# Altium PCB STM32_PCB.PcbDoc
Units mm, origin at the board's own origin, x right, y up, seen from the top; angles counter-clockwise.
Board outline 44 x 44 mm, 4 copper layers (Top Layer, Int1 (GND), Int2 (PWR), Bottom Layer), stack 1.57 mm thick; 35 components, 27 nets, 174 pads, 167 vias.
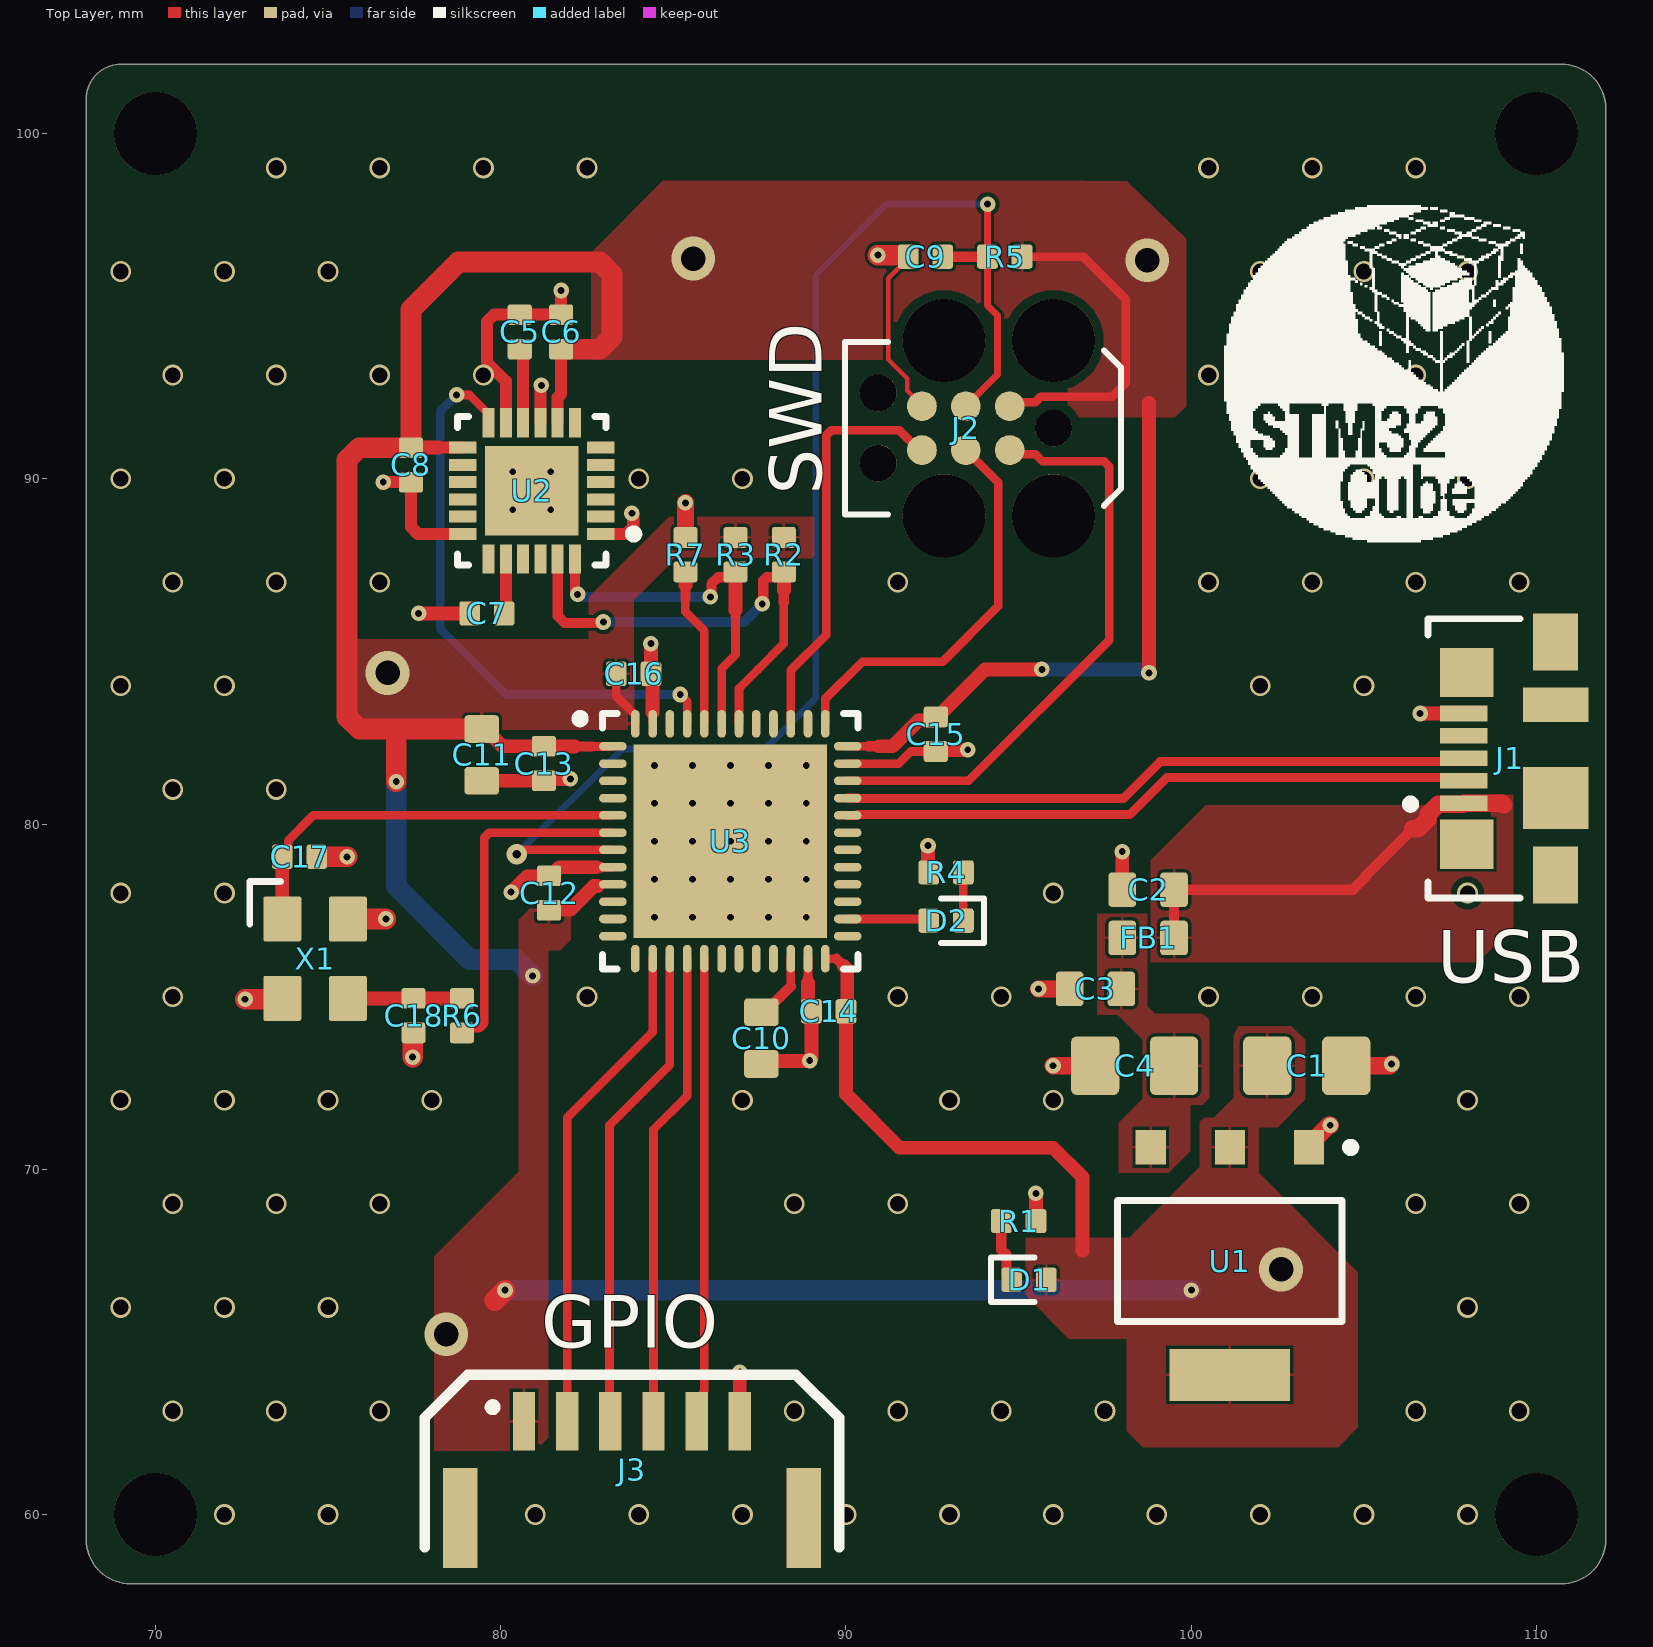
[diagram p0: Top Layer view]
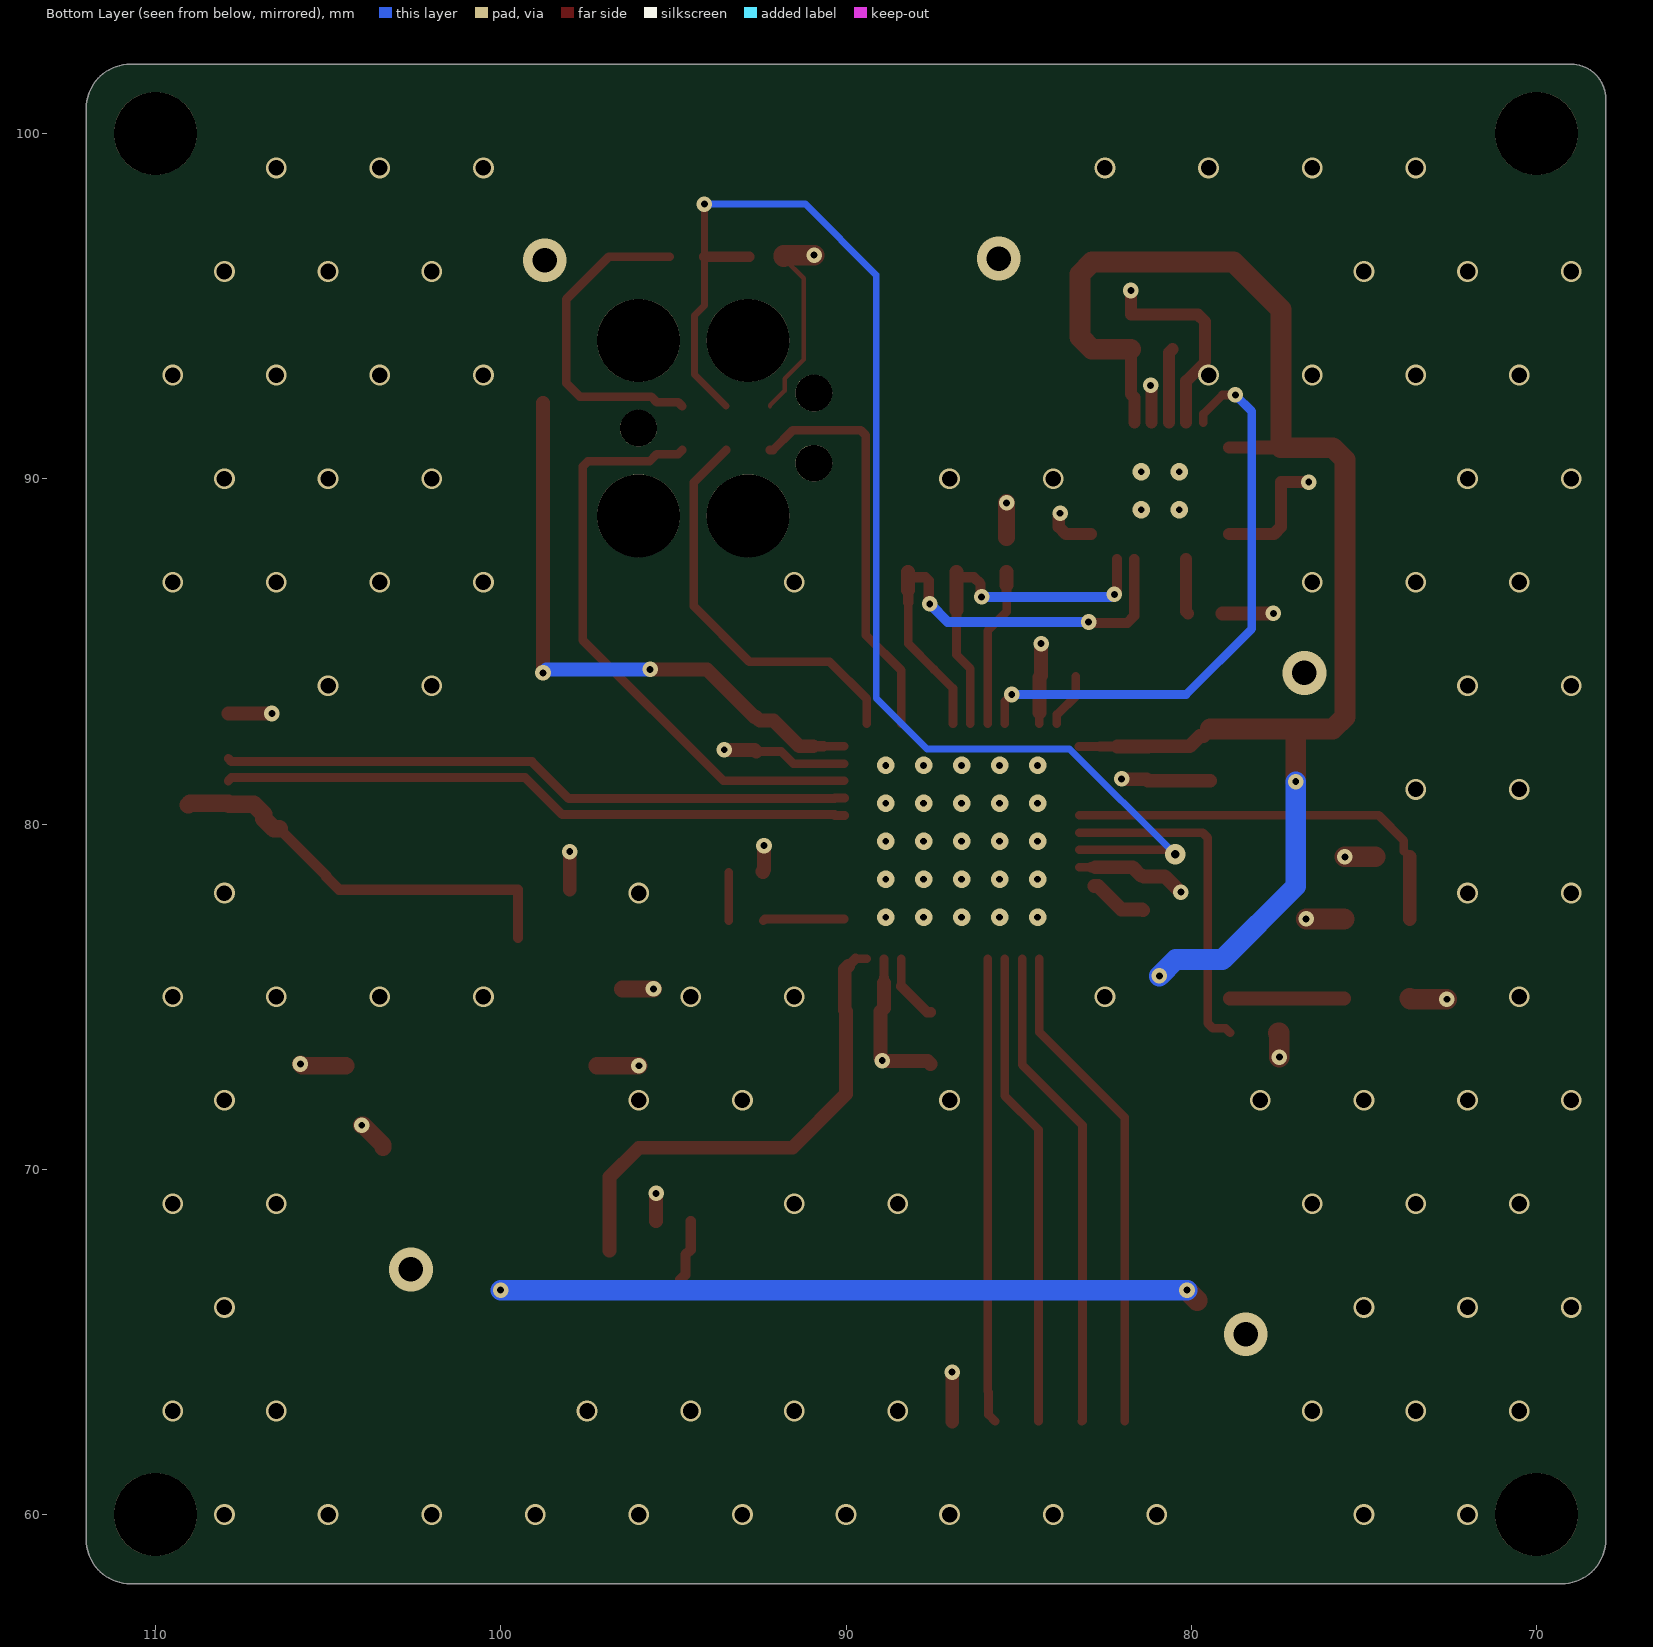
[diagram p1: Bottom Layer view, seen from below]
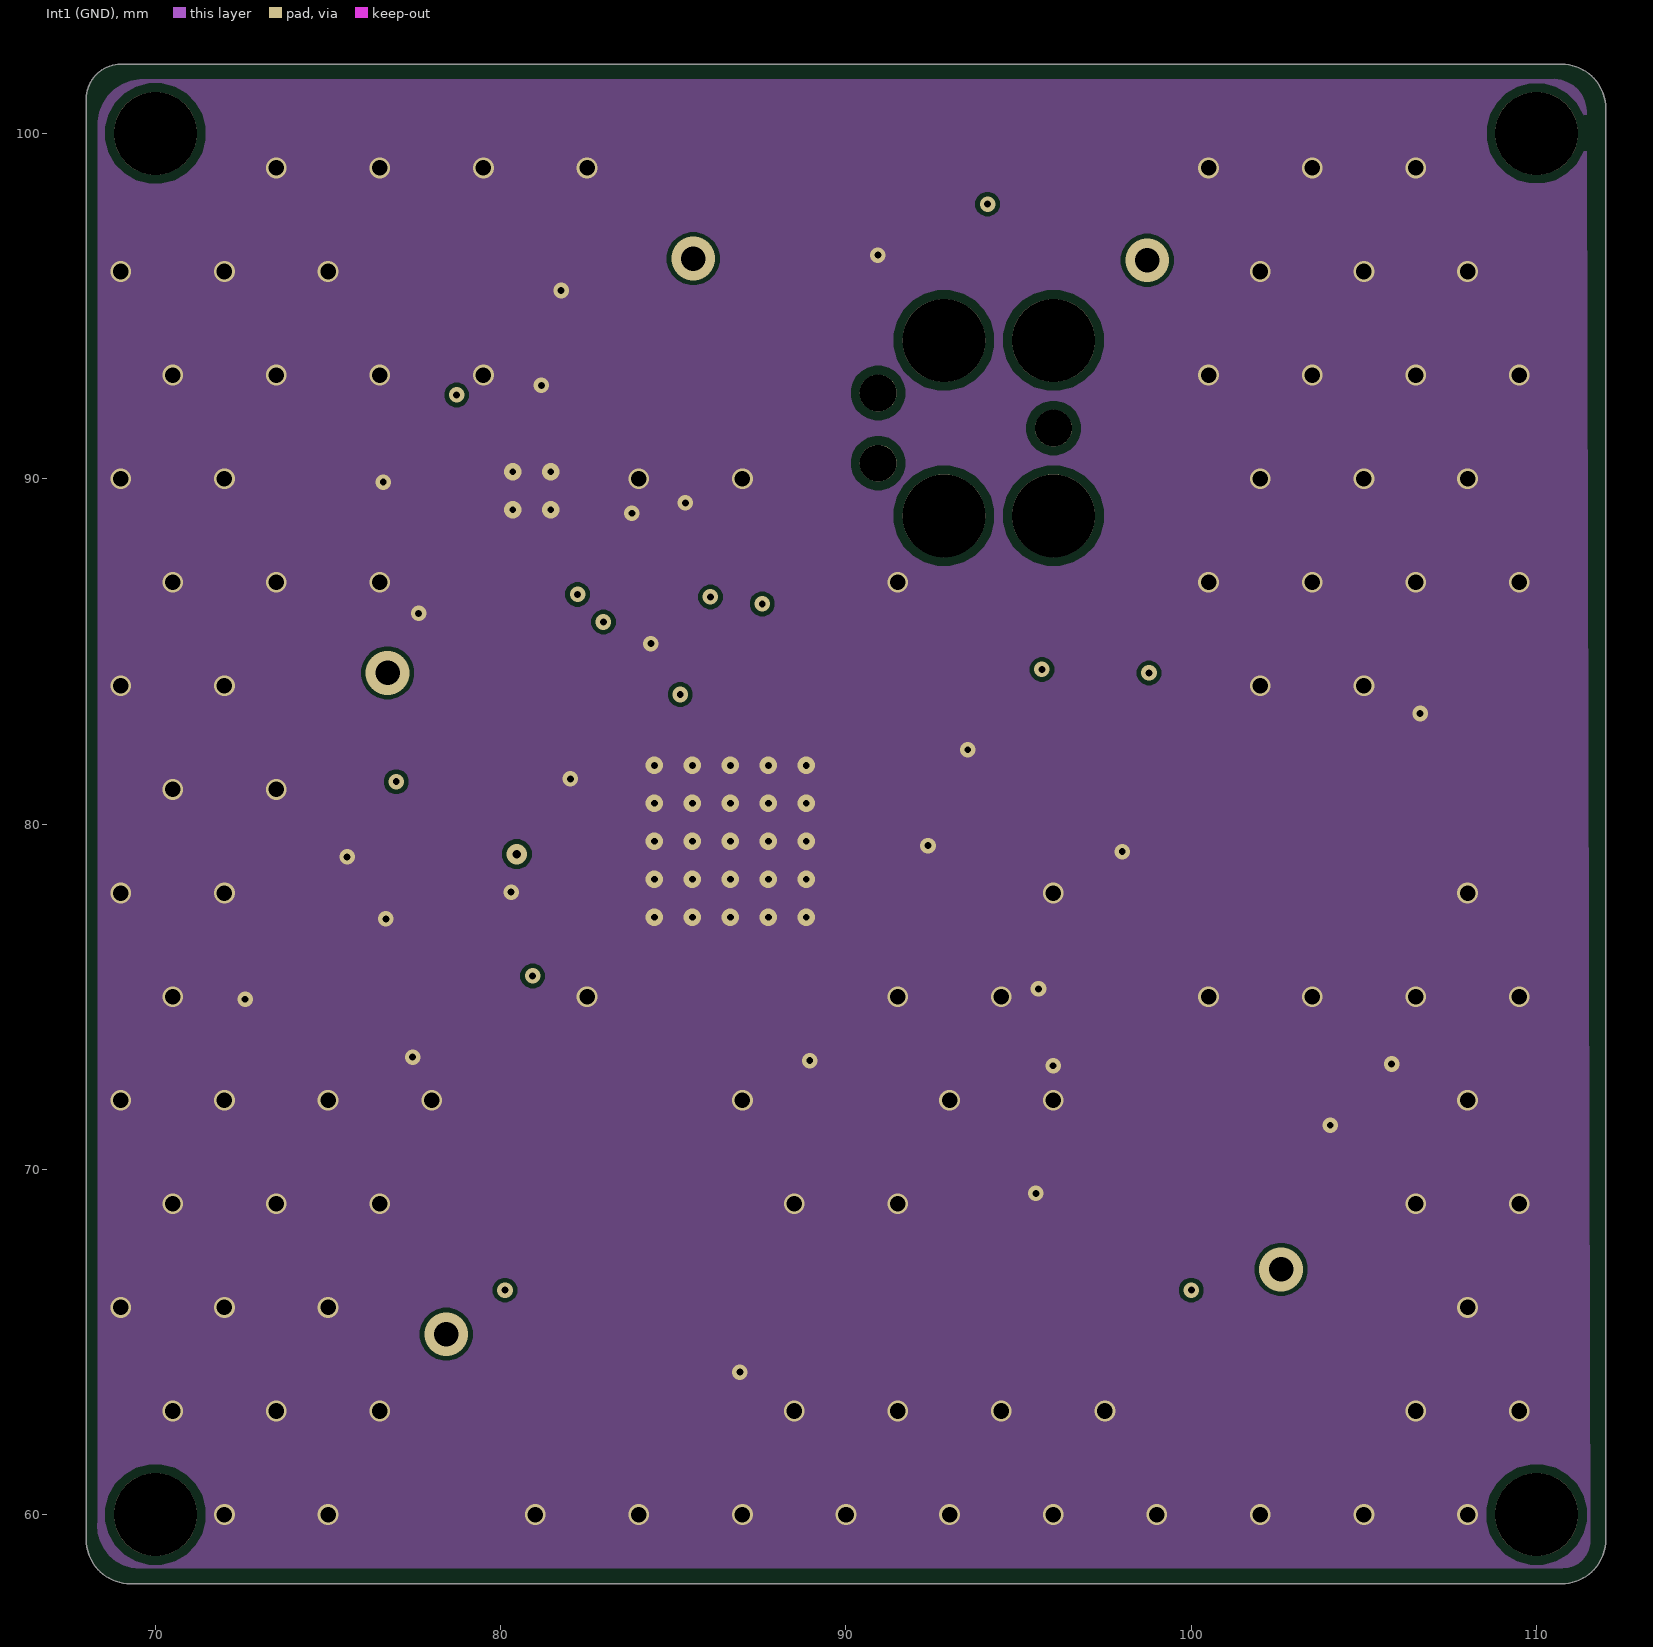
[diagram p2: Int1 (GND)]
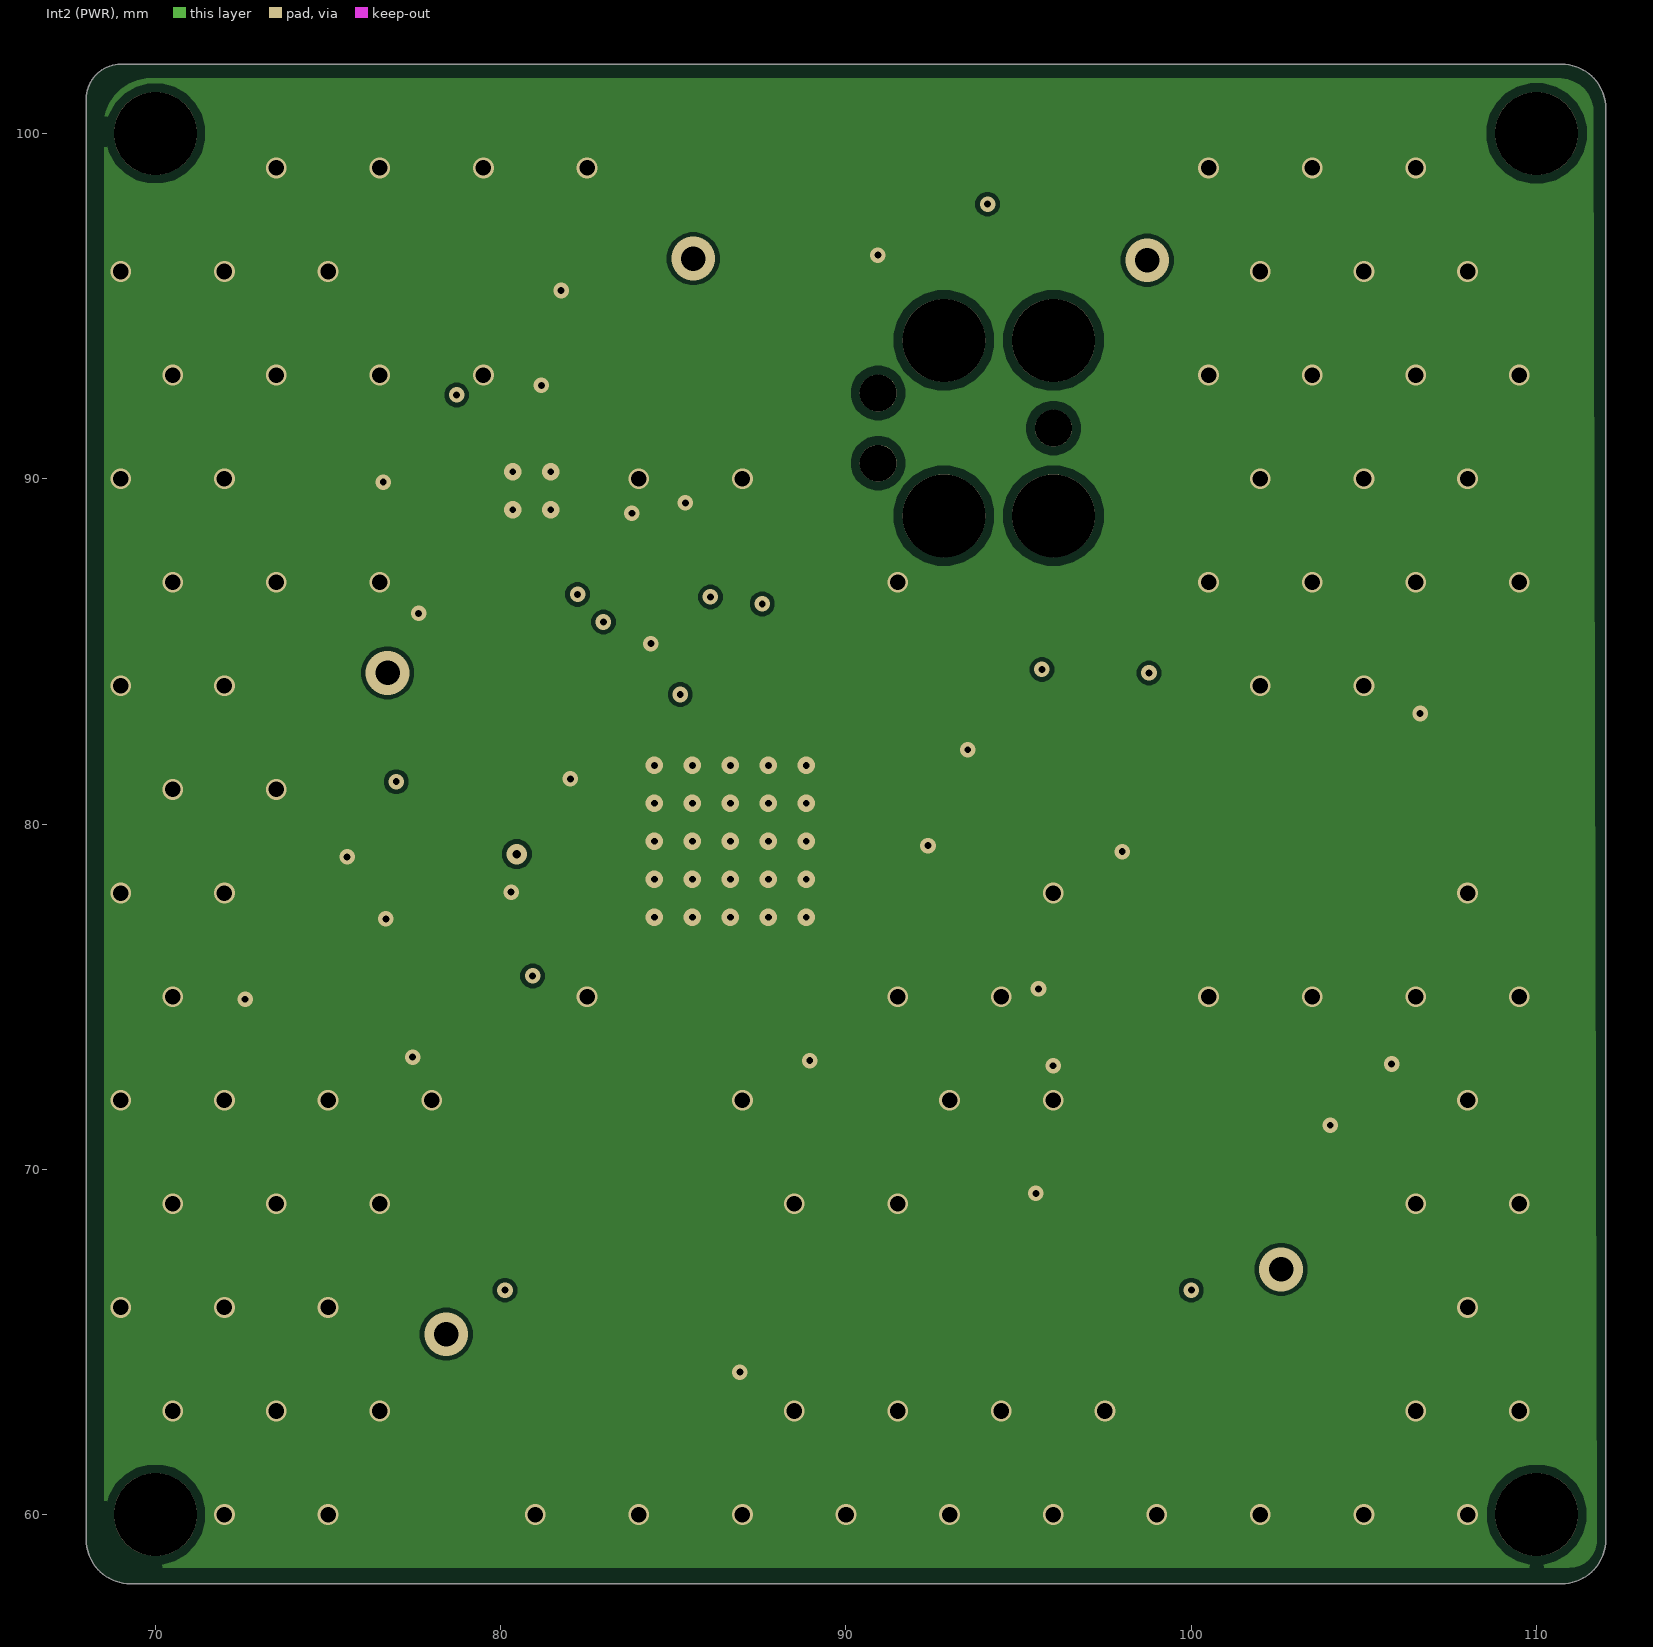
[diagram p3: Int2 (PWR)]
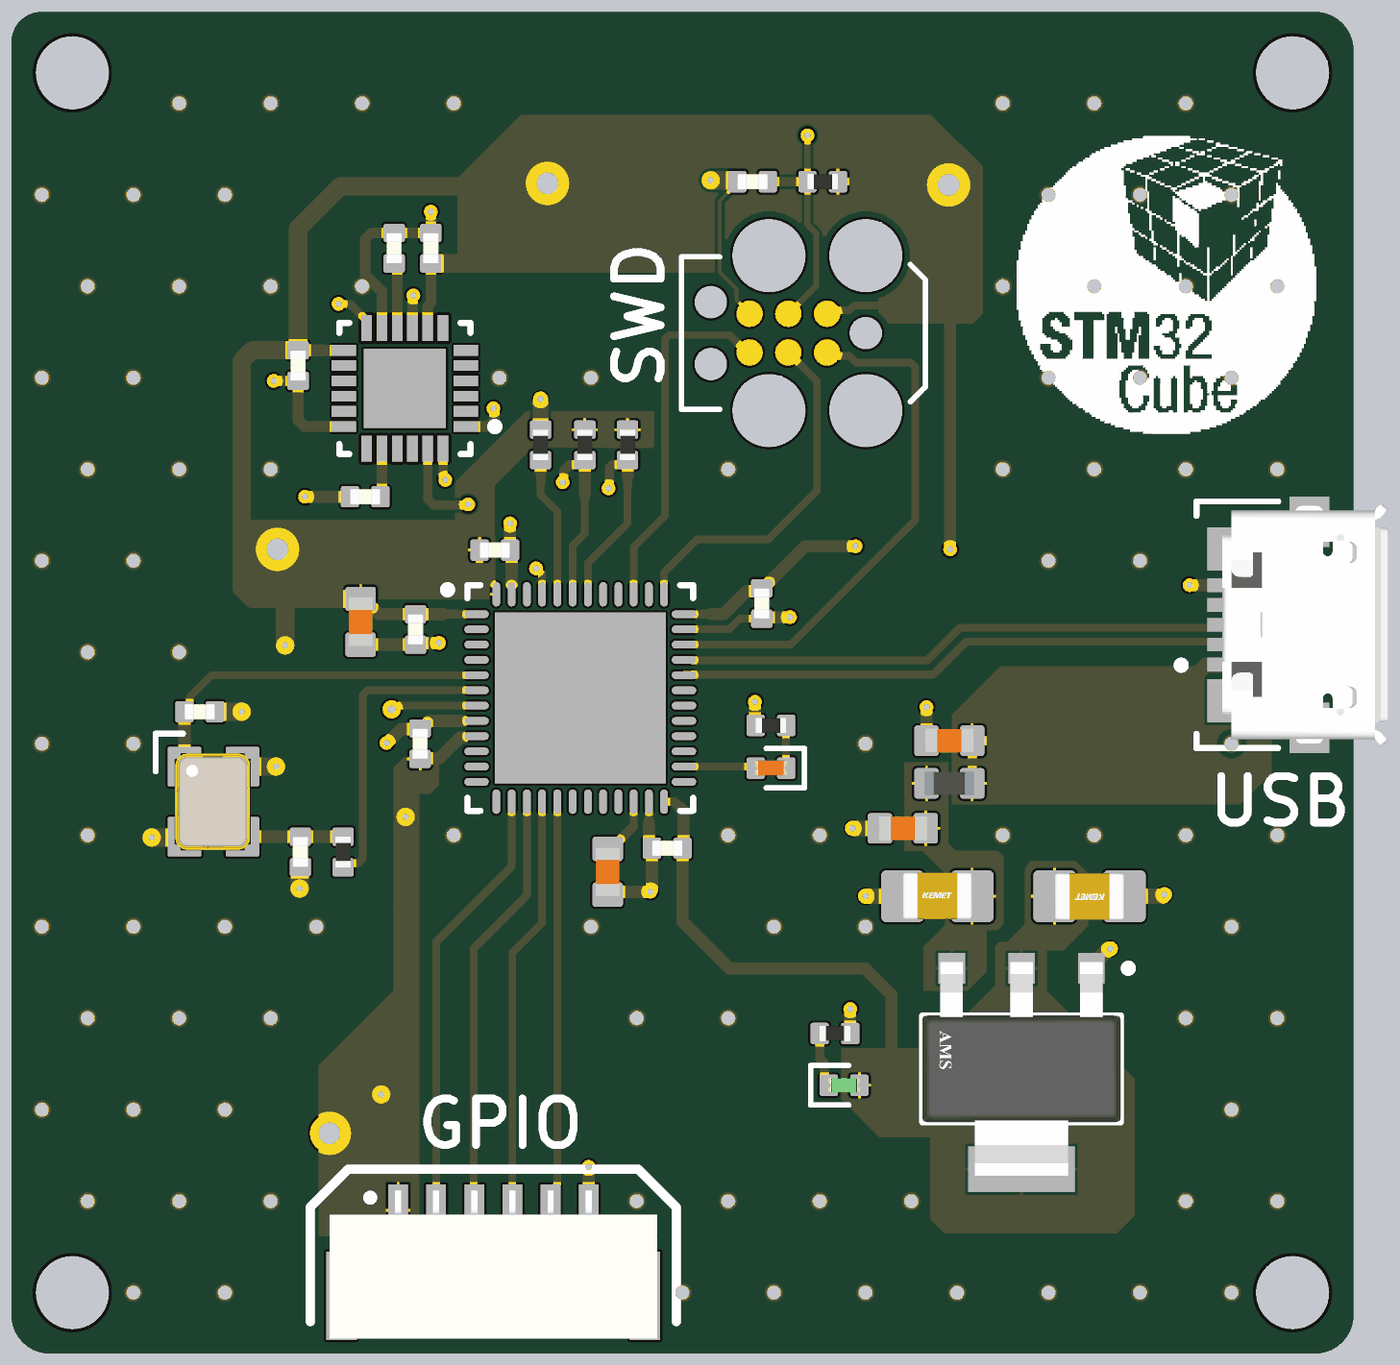
[diagram p4: 3D render of the assembled board from above, using the file's embedded part models]

## Layer stack, top to bottom
Top Solder: solder mask 0.0254, SM-001, Dk 4
Top Layer: signal copper 0.035
Dielectric 1: prepreg 0.2, PP-017, Dk 4.6
Int1 (GND): signal copper 0.0175
Dielectric 3: core 1.065, Core-039, Dk 4.6
Int2 (PWR): signal copper 0.0175
Dielectric 5: prepreg 0.2, PP-017, Dk 4.6
Bottom Layer: signal copper 0.035
Bottom Solder: solder mask 0.0254, SM-001, Dk 4

## Board outline
68,59.27 68,101 cw(c69,101) 69,102 110.73,102 cw(c110.73,100.73) 112,100.73 112,59.27 cw(c110.73,59.27) 110.73,58 69.27,58 cw(c69.27,59.27)

## Design rules (kind name [scope] priority, off if disabled: settings)
BoardOutlineClearance [All] p1: gap=0.2 ignorepadtopadclearanceinfootprint=FALSE
Clearance [All] p1: gap=0.089 ignorepadtopadclearanceinfootprint=FALSE except(0.127: Arc-Via Track-Via SMDPad-Via THPad-Via Via-Via Via-Fill Via-Poly Via-Region Via-Text; 0.25: Arc-Hole Track-Hole SMDPad-Hole THPad-Hole Via-Hole Fill-Hole Poly-Hole Region-Hole Text-Hole)
ComponentClearance [All] p1: gap=0.089 collisioncheckmode=3 verticalgap=0.089 showdistances=TRUE
DiffPairsRouting [All] p1: maxlimit=0.203 minlimit=0.089 mostfreqgap=0.203 toplayer_mingap=0.203 toplayer_minwidth=0.26 toplayer_maxwidth=0.26 toplayer_prefwidth=0.26 bottomlayer_mingap=0.203 bottomlayer_minwidth=0.26 bottomlayer_maxwidth=0.26 bottomlayer_prefwidth=0.26 impedanceprofiledriven=TRUE impedanceprofileid={F461AAE1-0BB9-4B3C-9129-8E3C035E33D3} impedanceprofilevalue=90.000000 maxuncoupledlength=12.7
Height [All] p1: minheight=0 maxheight=1816.048 prefheight=12.7
HoleSize [All] p1: absolutevalues=TRUE maxlimit=6.3 minlimit=0.2 maxpercent=80.000 minpercent=20.000
HoleToHoleClearance [All] p1: gap=0.25 allowstackedmicrovias=FALSE
MinimumAnnularRing [All] p1: minimumring=0.076
MinimumSolderMaskSliver [All] p1: minsoldermaskwidth=0
PlaneClearance [All] p1: clearance=0.089
PlaneConnect PlaneConnectPowerPads [InPadClass('PowerPads')] p1: planeconnectstyle=Direct reliefexpansion=0.508 reliefentries=4 reliefconductorwidth=0.254 reliefairgap=0.254
PlaneConnect [All] p2: planeconnectstyle=Direct reliefexpansion=0.3 reliefentries=4 reliefconductorwidth=0.089 reliefairgap=0.089
PolygonConnect PolygonConnectPowerPads [All vs (InPadClass('PowerPads'))] p1: connectstyle=Direct reliefconductorwidth=0.254 reliefentries=4 polygonreliefangle="90 Angle" airgapwidth=0.254
PolygonConnect [All] p2: thpad.connectstyle=Relief thpad.reliefconductorwidth=0.089 thpad.reliefentries=4 thpad.polygonreliefangle="90 Angle" thpad.airgapwidth=0.089 smdpad.connectstyle=Relief smdpad.reliefconductorwidth=0.089 smdpad.reliefentries=4 smdpad.polygonreliefangle="90 Angle" smdpad.airgapwidth=0.089 via.connectstyle=Direct via.reliefconductorwidth=0.127 via.reliefentries=4 via.polygonreliefangle="90 Angle" via.airgapwidth=0.127
RoutingVias [All] p1: holewidth=0.2 width=0.45 viastyle="Through Hole" minholewidth=0.2 minwidth=0.45 maxholewidth=6.3 maxwidth=6.55
SilkToSilkClearance [All] p1: silktosilkclearance=0
SilkToSolderMaskClearance [IsPad] p1: minsilkscreentomaskgap=0.089 clearancetoexposedcopper=TRUE
SolderMaskExpansion [All] p1: expansion=0.075 istentingtop=FALSE
Width [All] p1: maxlimit=1816.048 minlimit=0.089 preferedwidth=0.089
20 further rules are at their usual default settings.

## Classes and differential pairs
differential pair class DIFF_USB: USB_D
differential pair USB_D: +USB_D_P -USB_D_N

## Components (designator, comment, footprint, x,y, rotation, side; value= is the part's Value field where it differs from the comment)
C1 "22u" CAP_0805 103.343,73 r180 top
C2 "2u2" CAP_0603 98.75,78.1 r0 top
C3 "2u2" CAP_0603 97.225,75.225 r0 top
C4 "22u" CAP_0805 98.357,73 r0 top
C5 "100n" CAP_0402 80.55,94.25 r270 top
C6 "10n" CAP_0402 81.75,94.25 r270 top
C7 "2n2" CAP_0402 79.6,86.1 r0 top
C8 "100n" CAP_0402 77.4,90.4 r90 top
C9 "100n" CAP_0402 92.3,96.43 r0 top
C10 "2u2" CAP_0603 87.55,73.8 r90 top
C11 "2u2" CAP_0603 79.45,82 r90 top
C12 "100n" CAP_0402 81.4,78 r270 top
C13 "100n" CAP_0402 81.25,81.75 r90 top
C14 "100n" CAP_0402 89.5,74.575 r0 top
C15 "100n" CAP_0402 92.6,82.6 r90 top
C16 "100n" CAP_0402 83.85,84.35 r180 top
C17 "10 p" CAP_0402 74.175,79.05 r180 top
C18 "10 p" CAP_0402 77.475,74.45 r90 top
D1 "GREEN" LED_0402_GREEN 95.3,66.8 r180 top
D2 "RED" LED_0402_RED 92.9,77.2 r0 top
FB1 "102R" FB_0603 98.75,76.7 r180 top
J1 "473460001" FP-473460001-MFG 110.2,81.9 r90 top
J2 "TC2030" TC2030-FP 93.47,91.465 r180 top
J3 "SM06B-GHS-TB" SM06B-GHS-TB 83.8,61.3 r0 top
R1 "1K" RES_0402 95,68.5 r180 top
R2 "2k2" RES_0402 88.2,87.8 r90 top
R3 "2k2" RES_0402 86.8,87.8 r90 top
R4 "1K" RES_0402 92.9,78.6 r0 top
R5 "10K" RES_0402 94.6,96.43 r0 top
R6 "0R" RES_0402 78.875,74.45 r270 top
R7 "10K" RES_0402 85.35,87.8 r270 top
U1 "ams1117" FP-ams1117-IPC_C 101.115,67.34 r270 top
U2 "MPU-6050" IS-QFN-24_V 80.9,89.65 r180 top
U3 "STM32F411CEU6" STM-UFQFPN48_L 86.65,79.5 r0 top
X1 "24MHz" XTAL_3225 74.625,76.1 r270 top

## Footprints (in the part's own frame and the unit in brackets; to place one, negate y for a bottom-side part, rotate by r counter-clockwise, add the part's x,y. Pads: shape width x height; smd on the part's side, far side on the other; paste and mask are expansions set on the pad)
CAP_0402 [mm]
  rrect25% 0.6x0.7 smd: 1(-0.5,0) 2(0.5,0)
  body extent -0.5,-0.26 0.5,0.26, height 0.37
CAP_0603 [mm]
  rrect25% 0.8x1 smd: 1(-0.75,0) 2(0.75,0)
  body extent -0.8,-0.4 0.8,0.4, height 0.51
CAP_0805 [mm]
  rrect25% 1.4x1.7 smd: 1(-1.143,0) 2(1.143,0)
  body extent -1.15,-0.76 1.15,0.79, height 1.01
FB_0603 [mm]
  rrect25% 0.8x1 smd: 1(-0.75,0) 2(0.75,0)
  body extent -0.8,-0.4 0.8,0.4, height 0.81
FP-473460001-MFG [mm]
  rect 0.45x1.38 smd paste+0 mask+0: 1(-1.3,2.31) 2(-0.65,2.31) 3(0,2.31) 4(0.65,2.31) 5(1.3,2.31)
  rect 1.425x1.55 smd paste+0 mask+0: 6(-2.488,2.225) 7(2.488,2.225)
  rect 1.65x1.3 smd paste+0 mask+0: 8(-3.375,-0.35) 11(3.375,-0.35)
  rect 1.8x1.9 smd paste+0 mask+0: 9(-1.15,-0.35)
  rect 1x1.9 smd paste+0 mask+0: 10(1.55,-0.35)
  silkscreen extent -4.05,0.67 4.05,3.97, body extent -4.3,-2.48 4.3,3.45, height 0.25
FP-ams1117-IPC_C [mm]
  rect 1.004x0.872 smd paste+0 mask+0: 1(-3.295,2.29) 2(-3.295,0) 3(-3.295,-2.29)
  rect 1.5x3.5 smd paste+0 mask+0: 4(3.295,0)
  silkscreen extent -3.42,-3.25 1.75,3.63, body extent -3.9,-3.35 3.9,3.35, height 0.25
IS-QFN-24_V [mm] "QFN, 24-Leads, Body 4x4mm, Pitch 0.5mm, Thermal Pad 2.7x2.6mm"
  rect 0.8x0.35 smd: 1(-2,1.25) 2(-2,0.75) 3(-2,0.25) 4(-2,-0.25) 5(-2,-0.75) 6(-2,-1.25) 13(2,-1.25) 14(2,-0.75) 15(2,-0.25) 16(2,0.25) 17(2,0.75) 18(2,1.25)
  rect 0.35x0.85 smd mask+0.102: 7(-1.25,-1.975) 8(-0.75,-1.975) 9(-0.25,-1.975) 10(0.25,-1.975) 11(0.75,-1.975) 12(1.25,-1.975) 19(1.25,1.975) 20(0.75,1.975) 21(0.25,1.975) 22(-0.25,1.975) 23(-0.75,1.975) 24(-1.25,1.975)
  rect 2.7x2.6 smd: 25(0,0)
  silkscreen extent -3.08,-2.15 2.15,2.15, body extent -2,-2 2,2, height 0.95
LED_0402_GREEN [mm]
  rrect25% 0.6x0.7 smd: A(-0.5,0) K(0.5,0)
  silkscreen extent -0.15,-0.65 1.1,0.65, body extent -0.51,-0.25 0.51,0.25, height 0.45
LED_0402_RED [mm]
  rrect25% 0.6x0.7 smd: A(-0.5,0) K(0.5,0)
  silkscreen extent -0.15,-0.65 1.1,0.65, body extent -0.51,-0.25 0.51,0.25, height 0.45
RES_0402 [mm]
  rrect25% 0.6x0.7 smd: 1(-0.5,0) 2(0.5,0)
  body extent -0.5,-0.25 0.5,0.25, height 0.3
SM06B-GHS-TB [mm]
  rect 0.65x1.7 smd: 1(-3.125,1.4) 2(-1.875,1.4) 3(-0.625,1.4) 4(0.625,1.4) 5(1.875,1.4) 6(3.125,1.4)
  rect 1x2.9 smd: ""(-4.975,-1.4) ""(4.975,-1.4)
  silkscreen extent -6,-2.25 6,2.75, body extent -5.38,-2.8 5.38,2.05, height 4.26
STM-UFQFPN48_L [mm] "QFN, 48-Leads, Body 7.1x7.1mm, Pitch 0.5mm, Thermal Pad 5.6x5.6mm, IPC High Density"
  oval 0.8x0.25 smd: 1(-3.4,2.75) 2(-3.4,2.25) 3(-3.4,1.75) 4(-3.4,1.25) 5(-3.4,0.75) 6(-3.4,0.25) 7(-3.4,-0.25) 8(-3.4,-0.75) 9(-3.4,-1.25) 10(-3.4,-1.75) 11(-3.4,-2.25) 12(-3.4,-2.75) 25(3.4,-2.75) 26(3.4,-2.25) 27(3.4,-1.75) 28(3.4,-1.25) 29(3.4,-0.75) 30(3.4,-0.25) 31(3.4,0.25) 32(3.4,0.75) 33(3.4,1.25) 34(3.4,1.75) 35(3.4,2.25) 36(3.4,2.75)
  oval 0.25x0.8 smd: 13(-2.75,-3.4) 14(-2.25,-3.4) 15(-1.75,-3.4) 16(-1.25,-3.4) 17(-0.75,-3.4) 18(-0.25,-3.4) 19(0.25,-3.4) 20(0.75,-3.4) 21(1.25,-3.4) 22(1.75,-3.4) 23(2.25,-3.4) 24(2.75,-3.4) 37(2.75,3.4) 38(2.25,3.4) 39(1.75,3.4) 40(1.25,3.4) 41(0.75,3.4) 42(0.25,3.4) 43(-0.25,3.4) 44(-0.75,3.4) 45(-1.25,3.4) 46(-1.75,3.4) 47(-2.25,3.4) 48(-2.75,3.4)
  rect 5.6x5.6 smd: 49(0,0)
  silkscreen extent -4.47,-3.7 3.7,3.7, body extent -3.55,-3.55 3.55,3.55, height 0.6
TC2030-FP [mm]
  round 0.863 smd paste-0.432: 1(-1.27,-0.635) 2(-1.27,0.635) 3(0,-0.635) 4(0,0.635) 5(1.27,-0.635) 6(1.27,0.635)
  round 2.4 hole 2.4 unplated: MH(-2.54,2.54) MH(-2.54,-2.54) MH(0.635,2.54) MH(0.635,-2.54)
  round 1.067 hole 1.067 unplated: MH(-2.54,0) MH(2.54,-1.016) MH(2.54,1.016)
  silkscreen extent -4.5,-2.5 3.5,2.5
XTAL_3225 [mm]
  rrect10% 1.3x1.1 smd: 1(-1.15,-0.95) 2(1.15,-0.95) 3(1.15,0.95) 4(-1.15,0.95)
  silkscreen extent -2.23,-1.89 -1,-1, body extent -1.6,-1.28 1.6,1.22, height 0.61

## Part data
C1 C4: library part CAP_0805, "Capacitor SMD 0805"
C2 C3 C10 C11: library part CAP_0603, "Capacitor SMD 0603"
C5 C6 C7 C8 C9 C12 C13 C14 C15 C16 C17 C18: library part CAP_0402, "Capacitor SMD 0402", Rating=16V
D1: library part LED_0402_GREEN, "LED 0402 GREEN SMD"
D2: library part LED_0402_RED, "LED 0402 RED SMD"
FB1: library part FB_0603, "Ferrite Bead SMD 0603"
J1: library part CMP-2000-05246-2, "CONN RCPT USB2.0 MICRO B SMD R/A", Current Rating=1.8A, Manufacturer=Molex, Package=0, Temperature="-30°C to +85°C", Temperature Range High=+85°C, Temperature Range Low=-30°C, Voltage Rating=30V, Automotive=No, Category=Conn, ComponentLink2Description=Datasheet, ComponentLink2URL=https://www.molex.com/webdocs/datasheets/pdf/en-us/0473460001_IO_CONNECTORS.pdf, Conn Orientation="Right Angle", Contact Material=Gold,Nickel, Device Class L1=Connectors, Device Class L2="USB Connectors", Device Class L3=unset, Digikey Description="CONN RCPT USB2.0 MICRO B SMD R/A", Footprint Url=https://www.molex.com/pdm_docs/sd/473460001_sd.pdf, Height=2.945mm, Is Female=yes, Lead Free=Yes, Manufacturer Part Number=473460001, Number Of Contacts=5, Octopart=https://octopart.com/47346-0001-molex-7164928, Pitch=0.65mm, RoHS=TRUE, Shielding=true, Usb Standard="USB 2.0"
J2: "Tag-Connect No-Solder SWD Debug Connector DO NOT PLACE", Manufacturer=Tag-Connect, Manufacturer Part Number=TC2030
J3: "Header Connector 6 Position 1.25MM Pitch SMD Horizontal JST GH", Manufacturer=JST, Manufacturer Part Number=SM06B-GHS-TB
R1 R2 R3 R4 R5 R6 R7: library part RES_0402, "Resistor SMD 0402"
U1: library part CMP-209535-000002-1, "1A LOW DROPOUT VOLTAGE REGULATOR", RoHS Compliant=Yes
U2: library part CMP-1753-00002-2, "3-Axis Gyroscope, Accelerometer and a Digital Motion Processor(TM) (DMP), 2.375 to 3.46 V, -40 to 85 degC, 24-Pin QFN, RoHS, Tape and Reel", Manufacturer=InvenSense, Standard Package=5,000, Category=Sensors,Transducers, Datasheet URL=http://datasheet.octopart.com/MPU-6050-InvenSense-datasheet-14421344.pdf, Datasheet Version="Rev. 3.3, 05/2012", Dynamic Catalog=MPU-6000™Series, Family=Multifunction, Featured Product=MPU-60506-Axis,IntegratedI²CSolution, Manufacturer URL=http://www.invensense.com/, Online Catalog=MPU-6000™Series, Other Names="1428-1007-2 / MPU6050", Output Type=Digital, Sensor Type=MotionTracking, Unit PriceUSD=Digital
U3: library part CMP-0243-00165-1, "ARM Cortex-M4 32-bit MCU+FPU, 512 KB Flash, 128 KB RAM, 36 I/Os, 48-Pin UFQFPN, -40 to 85 degC, Tray", I/Os (High Current)=36, Operating Frequency(F) (Processor speed) (MHz)=100, Package Description=UFQFPN48, Package Reference="48-Pin Ultra Thin Fine Pitch Quad Flat No-Lead, 7 x 7 x 0.6 mm Body, 0.5 mm Pitch, Exposed Pad", Supply Voltage(Vcc) min (V)=1.7, ComponentLink1Description="Manufacturer URL", ComponentLink1URL=http://www.st.com/, ComponentLink2Description=Datasheet, ComponentLink2URL=http://www.st.com/st-web-ui/static/active/en/resource/technical/document/datasheet/DM00115249.pdf, Core="ARM Cortex-M4", DatasheetVersion="Rev. 6", FLASH Size (Prog) (kB)=512, Internal RAM Size (kB)=128, Mounting Technology="Surface Mount", Packing=Tray
X1: library part TSX-3225_24.0000MF15X-AC, "Crystal SMD 24MHz 10PPM 7pF 3225", Manufacturer=Epson, Manufacturer Part Number="TSX-3225 24.0000MF15X-AC"

## Free pads (board coordinates)
  round 2.4 hole 2.4 unplated mask+0.102: MH(70,60) MH(70,100) MH(110,60) MH(110,100)

## Via types
v1: diameter 0.6, hole 0.45, Top Layer to Bottom Layer, tented both sides, 94 vias
v2: diameter 0.45, hole 0.2, Top Layer to Bottom Layer, 38 vias
v3: diameter 0.5, hole 0.2, Top Layer to Bottom Layer, 29 vias
v4: diameter 1.27, hole 0.711, Top Layer to Bottom Layer, 5 vias
v5: diameter 0.6, hole 0.25, Top Layer to Bottom Layer, 1 vias

## Nets (pads, with @x,y where several pads share a name; then routed paths per layer and width w, separated by ;. In a path a pad name is that pad's centre, name@x,y a point inside that pad or via, vN(x,y) a via of type N, cw(c..) or ccw(c..) an arc to the next point about the centre after c; other vN are vias at no path point)
+3V3: C1.2 C6.2 C8.2 C11.2 C12.2 C13.2 C14.2 C15.2 C16.2 D1.A J2.1 J3.1 R2.2 R3.2 R5.2 U1.2 U1.4 U2.8 U2.13 U3.1 U3.9 U3.24 U3.36 U3.48 | length 109.8
  Top Layer w0.25: C16.2@83.35,84.275 83.35,83.7 83.875,83.175 83.9,83.175 U3.48 ; U3.24 89.725,76.1 ; U3.36 90.65,82.25 ; J2.1 94.857,92.217 95.477,92.217 95.635,92.375 97.707,92.375 98.1,92.768 98.1,95.2 96.87,96.43 R5.2
  Top Layer w0.26: 82.645,82.245 83.245,82.245 U3.1
  Top Layer w0.3: 82.145,82.245 82.645,82.245 ; 89.725,76.1 89.936,75.889 ; 90.65,82.25 90.95,82.25
  Top Layer w0.35: 78.2,90.9 U2.13 ; U2.8 81.65,92.35 81.75,92.45 C6.2
  Top Layer w0.4: C8.2 78.2,90.9 ; C11.2 79.65,82.55 79.75,82.55 80.05,82.25 C13.2 81.255,82.245 82.145,82.245 ; C12.2 81.427,77.527 82.027,77.527 82.7,78.2 82.8,78.2 ; 89.936,75.889 90.036,75.789 90.036,74.611 C14.2 90,72.175 91.55,70.625 96,70.625 96.85,69.775 96.85,67.65 ; 90.95,82.25 91.35,82.25 92.1,83 92.5,83 C15.2 92.65,83.1 94.025,84.475 v2(95.675,84.475) ; v2(98.775,84.375) 98.775,92.2
  Top Layer w0.6: v2(76.975,81.225) 76.975,82.75 ; C11.2 76.975,82.75 ; 79.825,66.2 v2(80.125,66.5) ; C6.2@81.762,93.75 81.932,93.75 82.874,93.75 83.225,94.101 83.225,95.924 82.874,96.275 78.775,96.275 77.4,94.9 C8.2 75.901,90.9 75.55,90.549 75.55,83.101 75.901,82.75 76.975,82.75
  Bottom Layer w0.4: v2(95.675,84.475) 98.675,84.475 v2(98.775,84.375)
  Bottom Layer w0.6: v2(76.975,81.225) 76.975,78.2 79.1,76.075 80.45,76.075 v2(80.925,75.6) ; v2(80.125,66.5) v2(100,66.5)
  other v4: 78.425,65.225 102.6,67.1 76.725,84.375 98.725,96.325 85.575,96.375
+5V: C3.2 C4.2 FB1.2 U1.3
GND: C1.1 C2.1 C3.1 C4.1 C5.1 C6.1 C7.1 C8.1 C9.1 C10.1 C11.1 C12.1 C13.1 C14.1 C15.1 C16.1 C17.1 C18.1 J1.5 J2.5 J3.6 R1.1 R4.1 R7.1 U1.1 U2.1 U2.9 U2.11 U2.18 U2.25 U3.8 U3.23 U3.35 U3.47 U3.49 X1.2 X1.4 | length 50.5
  Top Layer w0.125: C9.1 91.8,96.38 91.225,95.805 91.225,93.45 91.776,92.899 91.776,92.551 92.2,92.127 J2.5
  Top Layer w0.25: U3.8@82.9,78.75 U3.8 ; U3.47 U3.47@84.4,83.225 ; 88.9,75.55 U3.23 ; U3.35 91.525,81.75 91.875,82.1 C15.1
  Top Layer w0.3: 82.775,78.75 U3.8@82.9,78.75 ; 88.9,75.4 88.9,75.55
  Top Layer w0.35: v2(76.6,89.9) C8.1 77.4,88.605 77.605,88.4 78,88.4 U2.18 ; U2.11 80.15,92.825 79.6,93.375 79.6,94.545 79.805,94.75 C5.1 C6.1 v2(81.75,95.45) ; U2.9 81.15,92.183 81.158,92.191 81.158,92.681 v2(81.177,92.7) ; U2.1 83.635,88.4 83.84,88.605 83.84,88.933 83.8,88.973 v2(83.8,89)
  Top Layer w0.4: v2(77.625,86.1) C7.1 ; C11.1 79.75,81.25 C13.1 81.298,81.298 82.008,81.298 v2(82.018,81.307) ; v2(80.3,78.025) 80.314,78.025 80.767,78.478 81.378,78.478 C12.1 81.45,78.5 81.7,78.75 82.775,78.75 ; v2(84.35,85.225) 84.35,84.3 84.4,84.25 U3.47@84.4,83.225 ; J3.6 v2(86.925,64.125) ; C10.1 87.64,73.14 88.94,73.14 v2(88.95,73.15) 88.95,73.164 89,73.214 C14.1 88.9,74.675 88.9,75.4 ; v2(92.375,79.375) 92.375,78.675 92.425,78.625 R4.1 ; C15.1 92.65,82.15 92.66,82.14 93.515,82.14 v2(93.525,82.15) ; R1.1 v2(95.5,69.3) ; C2.1 v2(98,79.2) ; v2(106.625,83.2) J1.5
  Top Layer w0.5: R7.1 v2(85.35,89.3) ; v2(95.575,75.225) C3.1 ; v2(96,73) C4.1 ; U1.1 103.405,70.701 103.979,71.275 v2(104.025,71.275) ; C1.1 105.75,73 v2(105.8,73.05)
  Top Layer w0.6: v2(72.6,74.925) 73.65,74.925 X1.2 ; C17.1 v2(75.55,79.05) ; X1.4 v2(76.675,77.25) ; v2(77.45,73.25) 77.45,73.95 C18.1 ; v2(90.925,96.475) 91.8,96.475 C9.1
  other v1: 72,60 75,60 81,60 84,60 87,60 90,60 93,60 96,60 99,60 102,60 105,60 108,60 70.5,63 73.5,63 76.5,63 88.5,63 91.5,63 94.5,63 97.5,63 106.5,63 109.5,63 69,66 72,66 75,66 108,66 70.5,69 73.5,69 76.5,69 88.5,69 91.5,69 106.5,69 109.5,69 69,72 72,72 75,72 78,72 87,72 93,72 96,72 108,72 70.5,75 82.5,75 91.5,75 94.5,75 100.5,75 103.5,75 106.5,75 109.5,75 69,78 72,78 96,78 108,78 70.5,81 73.5,81 69,84 72,84 102,84 105,84 70.5,87 73.5,87 76.5,87 91.5,87 100.5,87 103.5,87 106.5,87 109.5,87 69,90 72,90 84,90 87,90 102,90 105,90 108,90 70.5,93 73.5,93 76.5,93 79.5,93 100.5,93 103.5,93 106.5,93 109.5,93 69,96 72,96 75,96 102,96 105,96 108,96 73.5,99 76.5,99 79.5,99 82.5,99 100.5,99 103.5,99 106.5,99
  other v3: 84.45,77.3 85.55,77.3 86.65,77.3 87.75,77.3 88.85,77.3 84.45,78.4 85.55,78.4 86.65,78.4 87.75,78.4 88.85,78.4 84.45,79.5 85.55,79.5 86.65,79.5 87.75,79.5 88.85,79.5 84.45,80.6 85.55,80.6 86.65,80.6 87.75,80.6 88.85,80.6 84.45,81.7 85.55,81.7 86.65,81.7 87.75,81.7 88.85,81.7 80.35,89.1 81.45,89.1 80.35,90.2 81.45,90.2
IMU_CPOUT: C7.2 U2.20 | length 1.6
  Top Layer w0.35: C7.2 80.15,86.15 U2.20
IMU_INT: U2.12 U3.45 | length 17
  Top Layer w0.25: v2(78.725,92.425) 79.1,92.425 79.65,91.875 U2.12 ; v2(85.2,83.75) 85.4,83.55 U3.45
  Bottom Layer w0.25: v2(78.725,92.425) 78.25,91.95 78.25,85.65 80.15,83.75 v2(85.2,83.75)
IMU_REGOUT: C5.2 U2.10 | length 2.2
  Top Layer w0.35: C5.2 80.65,93.65 U2.10
IMU_SCL: R2.1 U2.23 U3.42 | length 14.2
  Top Layer w0.25: U3.42 86.9,83.925 87.45,84.475 88.2,85.225 88.2,86.425
  Top Layer w0.3: U2.23 81.65,86.025 81.854,85.821 82.946,85.821 v2(82.975,85.85) ; v2(87.575,86.375) 87.6,86.4 87.6,87.049 87.701,87.15 88.05,87.15 R2.1 ; 88.2,86.425 88.2,86.775
  Top Layer w0.4: 88.2,86.775 R2.1
  Bottom Layer w0.3: v2(82.975,85.85) 87.05,85.85 v2(87.575,86.375)
IMU_SDA: R3.1 U2.24 U3.43 | length 10.7
  Top Layer w0.25: U3.43 86.4,84.5 86.8,84.9 86.8,86.025
  Top Layer w0.3: U2.24 82.151,87.674 82.151,86.765 82.225,86.691 v2(82.225,86.65) ; v2(86.075,86.575) 86.104,86.604 86.104,86.952 86.301,87.15 86.65,87.15 R3.1 ; 86.8,86.025 86.8,86.2
  Top Layer w0.4: 86.8,86.2 R3.1
  Bottom Layer w0.3: v2(82.225,86.65) 82.266,86.65 82.341,86.575 v2(86.075,86.575)
LED_PWR_K: D1.K R1.2 | length 1.8
  Top Layer w0.3: R1.2 94.5,67.675 94.65,67.525 94.65,66.95 D1.K
MCU_Boot0: R7.2 U3.44 | length 4.6
  Top Layer w0.25: 85.35,86.525 85.35,86.15 85.9,85.6 U3.44
  Top Layer w0.3: 85.35,86.525 85.35,86.925
  Top Layer w0.4: 85.35,86.925 R7.2
MCU_LED_A: D2.A U3.26 | length 2.4
  Top Layer w0.25: U3.26 92.35,77.25 D2.A
MCU_LED_K: D2.K R4.2 | length 1.4
  Top Layer w0.25: D2.K R4.2
MCU_NRST: C9.2 J2.3 R5.1 U3.7 | length 39.1
  Top Layer w0.2: J2.3 94.385,93.015 94.385,94.729 94.1,95.014 R5.1 v2(94.1,97.95)
  Top Layer w0.25: v5(80.465,79.127) 80.56,79.127 80.683,79.25 U3.7
  Top Layer w0.3: C9.2 R5.1
  Bottom Layer w0.2: v5(80.465,79.127) 80.477,79.127 83.527,82.177 87.652,82.177 89.125,83.65 89.125,95.9 91.175,97.95 v2(94.1,97.95)
MCU_OSC_IN: C17.2 U3.5 X1.1 | length 12
  Top Layer w0.25: C17.2 73.843,79.218 73.843,79.518 74.575,80.25 U3.5
  Top Layer w0.4: X1.1 C17.2
MCU_OSC_OUT: R6.2 U3.6 | length 9.9
  Top Layer w0.25: R6.2 79.008,74.083 79.379,74.083 79.525,74.229 79.525,79.604 79.671,79.75 U3.6
MCU_PA4: J3.2 U3.14 | length 14.4
  Top Layer w0.25: J3.2 81.925,71.5 84.4,73.975 U3.14
MCU_PA5: J3.3 U3.15 | length 14.1
  Top Layer w0.25: J3.3 83.15,62.725 83.15,71.275 84.9,73.025 U3.15
MCU_PA6: J3.4 U3.16 | length 13.8
  Top Layer w0.25: J3.4 84.425,71.15 85.4,72.125 U3.16
MCU_PA7: J3.5 U3.17 | length 13.5
  Top Layer w0.25: J3.5 85.875,62.9 85.875,63.546 85.9,63.571 U3.17
MCU_SWCLK: J2.4 U3.37 | length 11.8
  Top Layer w0.25: U3.37 89.4,83.625 90.475,84.7 92.8,84.7 94.41,86.31 94.41,89.89 J2.4
MCU_SWDIO: J2.2 U3.34 | length 17.4
  Top Layer w0.25: U3.34 93.55,81.25 97.625,85.325 97.625,90.354 97.479,90.5 95.69,90.5 95.477,90.713 94.857,90.713 J2.2
MCU_SWO: J2.6 U3.39 | length 11.9
  Top Layer w0.25: U3.39 88.4,84.45 89.425,85.475 89.425,91.257 89.571,91.403 91.541,91.403 92.114,90.83 J2.6
MCU_VCAP1: C10.2 U3.22 | length 2
  Top Layer w0.25: 88.4,75.3 U3.22
  Top Layer w0.3: C10.2 87.65,74.55 88.4,75.3
USB_D_N: J1.2 U3.32 | length 18.3
  Top Layer w0.26: U3.32 90.315,80.25 90.333,80.268 98.216,80.268 99.291,81.343 107.797,81.343 J1.2
USB_D_P: J1.3 U3.33 | length 18.3
  Top Layer w0.26: U3.33 90.315,80.75 90.333,80.732 98.024,80.732 99.099,81.807 107.797,81.807 J1.3
VBUS: C2.2 FB1.1 J1.1 | length 12.1
  Top Layer w0.3: FB1.1 C2.2 104.672,78.1 105.049,78.477 105.049,78.499 106.41,79.86
  Top Layer w0.5: 106.41,79.86 106.568,79.86 106.861,80.153 106.861,80.282 107.154,80.575 107.865,80.575 J1.1 109,80.6 109.05,80.55
XTAL_IN: C18.2 R6.1 X1.3 | length 3.3
  Top Layer w0.4: X1.3 C18.2 R6.1
pads on no net: J1.4 J1.6 J1.7 J1.8 J1.9 J1.10 J1.11 J2.MH J3. U2.2 U2.3 U2.4 U2.5 U2.6 U2.7 U2.14 U2.15 U2.16 U2.17 U2.19 U2.21 U2.22 U3.2 U3.3 U3.4 U3.10 U3.11 U3.12 U3.13 U3.18 U3.19 U3.20 U3.21 U3.25 U3.27 U3.28 U3.29 U3.30 U3.31 U3.38 U3.40 U3.41 U3.46

## Polygon pours and split planes (outlines as drawn)
VBUS on Top Layer "NONET_L-01_P-001" (solid, pour order 14): 106.925,80.55 100.425,80.55 98.825,78.95 98.825,76 108.3,76 109.325,77.025 109.325,80.85 107.225,80.85
+3V3 on Top Layer "NONET_L-01_P-001" (solid, pour order 13): 83.852,85.35 75.6,85.35 75.6,83.2 76.075,82.725 83.88,82.725
+3V3 on Top Layer "NONET_L-01_P-001" (solid, pour order 10): 84.7,98.625 82.625,96.55 82.625,93.45 96.9,93.45 96.9,98.625
+3V3 on Top Layer "NONET_L-01_P-001" (solid, pour order 9): 98.118,98.625 99.85,96.949 99.85,92.1 99.525,91.775 96.425,91.775 96.425,95.55 94.675,95.55 94.675,98.609
+3V3 on Top Layer "NONET_L-01_P-001" (solid, pour order 7): 82.55,83.85 82.55,86.575 84.875,88.9 89.075,88.9 89.075,87.686 85.099,87.724 83.85,86.475 83.85,83.775 82.625,83.775
+5V on Top Layer "NONET_L-01_P-001" (solid, pour order 6): 97.9,71.35 97.9,69.9 99.35,69.9 99.975,70.525 99.975,72.056 98.606,72.056
+3V3 on Top Layer "NONET_L-01_P-001" (solid, pour order 5): 95.2,66.35 96.45,65.1 98.35,65.1 98.35,68.025 95.2,68.025
+5V on Top Layer "NONET_L-01_P-001" (solid, pour order 4): 97.275,74.475 97.275,77.4 98.725,77.4 98.725,74.725 98.95,74.5 100.275,74.5 cw(c100.159,74.098) 100.525,74.3 100.525,72.075 100.325,71.875 98.6,71.875 98.6,73.75 97.875,74.475
+3V3 on Top Layer "NONET_L-01_P-001" (solid, pour order 3): 102.5,71.225 103.3,72.025 103.3,73.75 102.9,74.15 101.381,74.15 101.225,73.9 101.225,72.075 100.65,71.5 100.375,71.5 100.375,71.441 100.591,71.225
+3V3 on Top Layer "NONET_L-01_P-001" (solid, pour order 2): 101.725,71.5 101.95,71.275 101.95,69.9 104.825,67.025 104.825,62.525 104.25,61.95 98.6,61.95 98.125,62.425 98.125,67.95 100.25,70.075 100.25,71.375 100.375,71.5
+3V3 on Top Layer "NONET_L-01_P-001" (solid, pour order 1): 81.075,77.775 81.875,77.775 82.025,77.625 82.025,76.65 81.725,76.35 80.993,76.35
+3V3 on Top Layer "NONET_L-01_P-001" (solid, pour order 0): 81.075,77.775 80.525,77.225 80.525,69.925 78.075,67.475 78.075,61.85 81,61.85 81.375,62.225 81.375,77.786
GND on Int1 (GND) "NONET_L-01_P-001" (solid, pour order 12): 68.325,100.225 cw(c69.675,100.225) 69.675,101.575 110.425,101.575 cw(c110.473,100.598) 111.45,100.65 111.55,59.175 cw(c110.747,59.253) 110.675,58.45 69.425,58.45 cw(c69.562,59.687) 68.325,59.825
GND on Int2 (PWR) "NONET_L-01_P-001" (solid, pour order 11): 68.515,100.24 cw(c69.865,100.24) 69.865,101.59 110.615,101.59 cw(c110.663,100.613) 111.64,100.665 111.74,59.19 cw(c110.938,59.268) 110.865,58.465 69.616,58.465 cw(c69.753,59.702) 68.515,59.84

## Silkscreen, mask and mechanical layers (free items; w line width, h text height)
Top Overlay:
  drawing of 103 lines, arcs and shapes, not listed
  text "SWD" at 89.296,89.529 h1.52 r90
  text "USB" at 107.129,75.404 h1.52
  text "GPIO" at 81.179,64.829 h1.52
Mechanical 1:
  lines w0.2: 68,59.27 ccw(c69.27,59.27) 69.27,58 110.73,58 ccw(c110.73,59.27) 112,59.27 112,100.73 ccw(c110.73,100.73) 110.73,102 69,102 ccw(c69,101) 68,101 68,64 68,59.27

## Text inside footprints (layer, text, board x,y; h text height)
D1: Mechanical 13 "+" at 97.183,66.292 h0.5 r180
D2: Mechanical 13 "+" at 91.017,77.708 h0.5